# Altium PCB ROV_PCB.PcbDoc
Units mil, origin at the board's own origin, x right, y up, seen from the top; angles counter-clockwise.
Board outline 4330.7 x 3645.66 mil, 2 copper layers (Top Layer, Bottom Layer); 32 components, 35 nets, 120 pads, 0 vias.
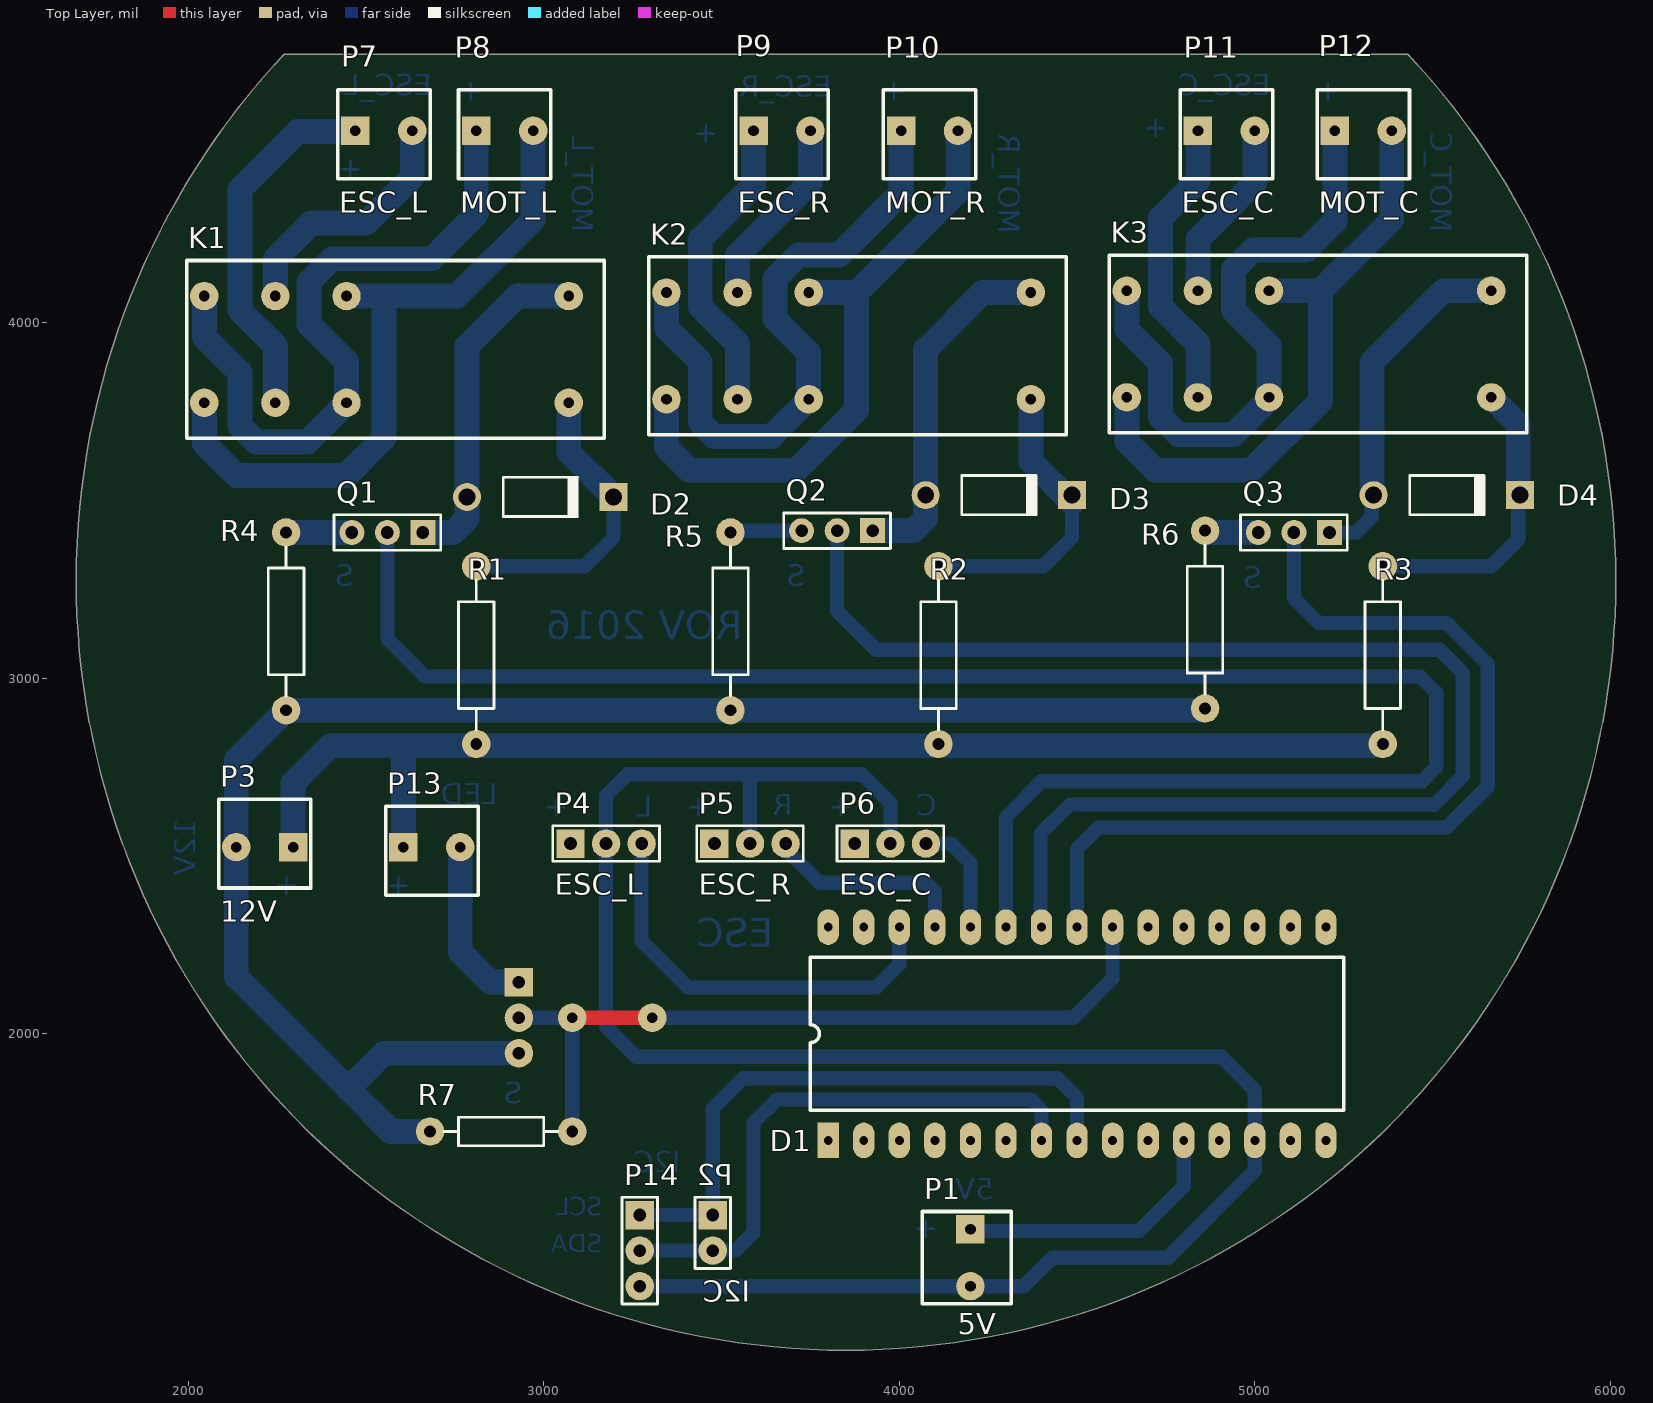
[diagram p0: Top Layer view]
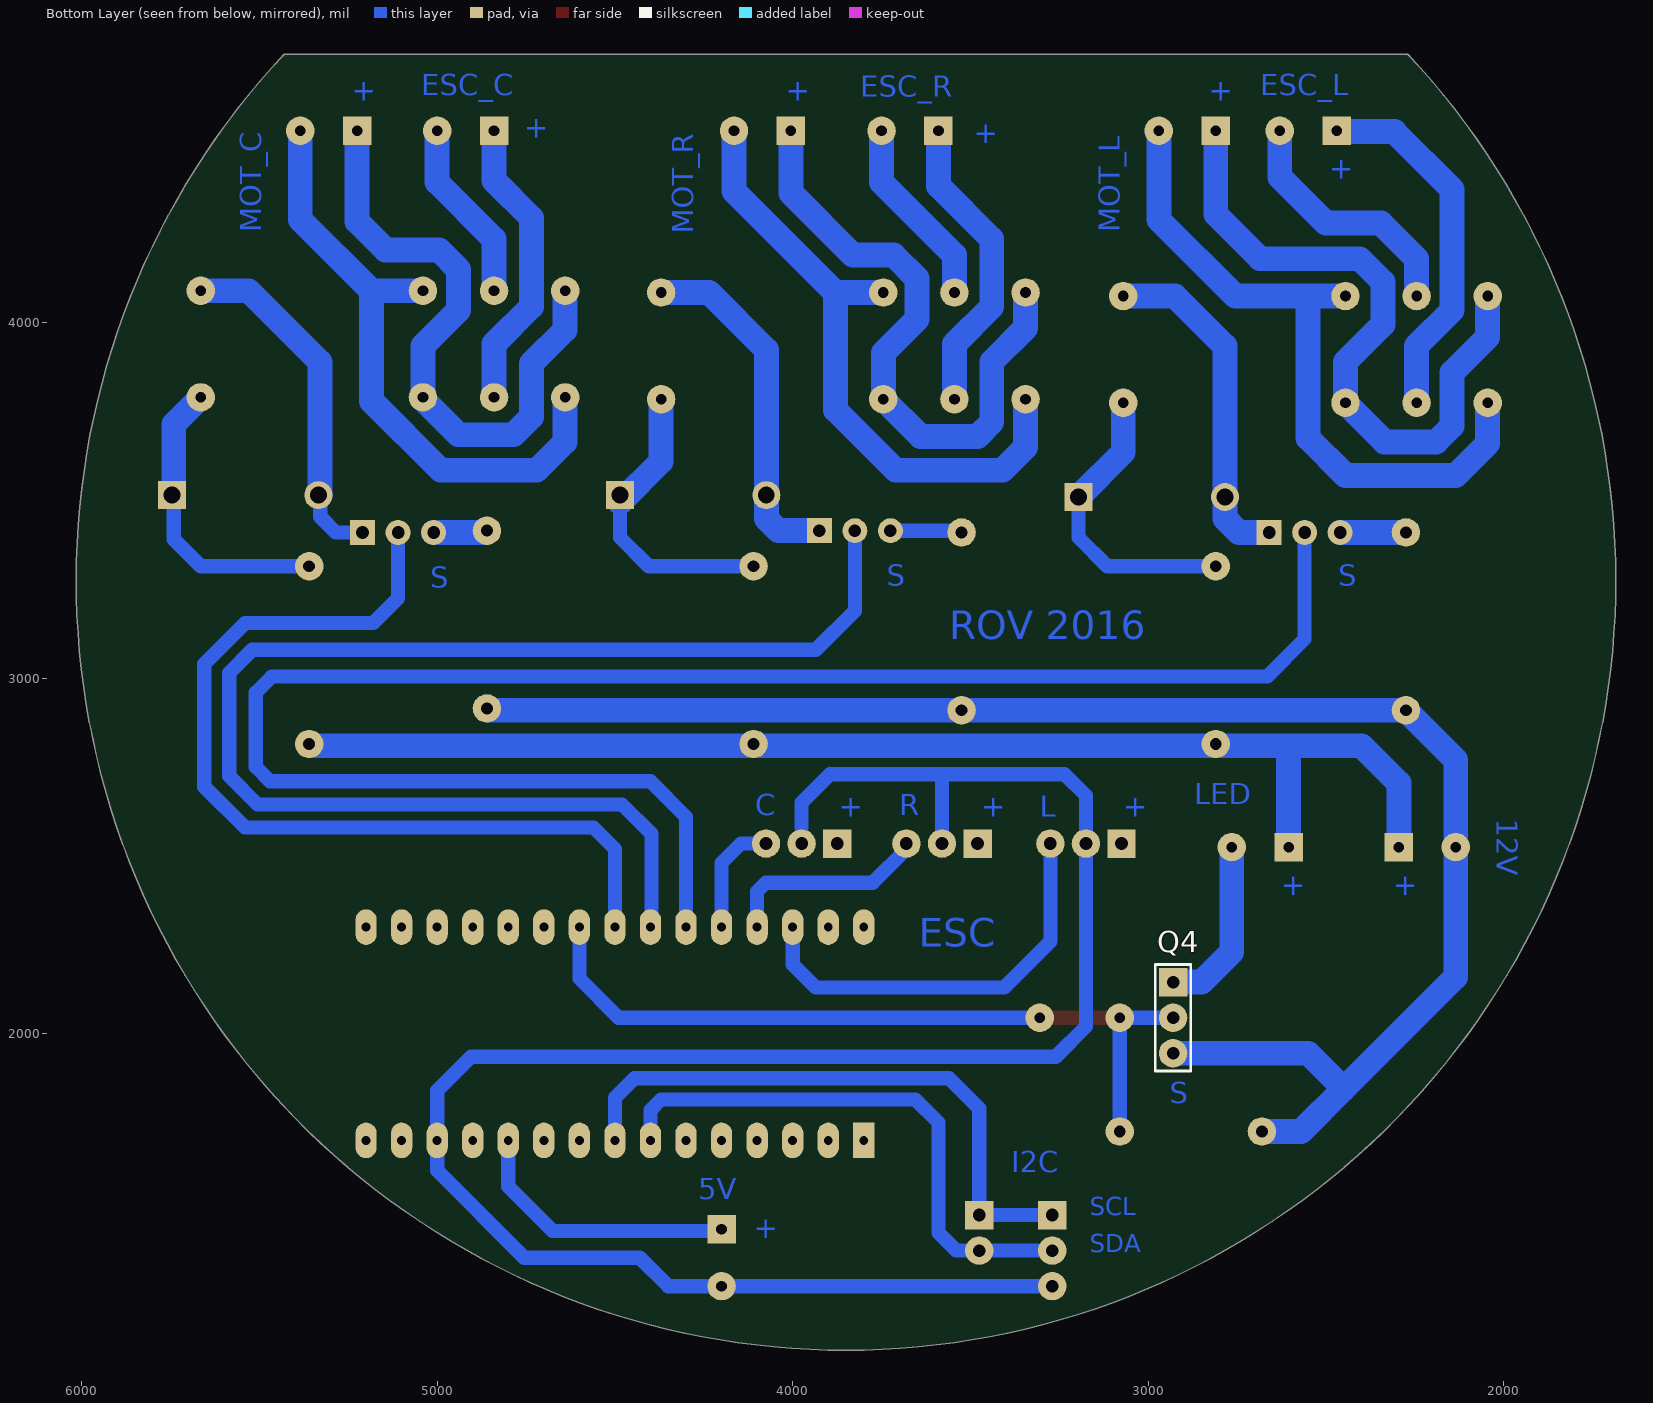
[diagram p1: Bottom Layer view, seen from below]

## Layer stack, top to bottom
Top Layer: signal copper 1.4
Dielectric: dielectric 12.6, FR-4, Dk 4.8
Bottom Layer: signal copper 1.4

## Board outline
2269.67,4755.31 ccw(c3850,3275) 5430.33,4755.31 5430.33,4755

## Design rules (kind name [scope] priority, off if disabled: settings)
Clearance [All] p1: gap=20
PolygonConnect [All] p1: connectstyle=Relief reliefconductorwidth=10 reliefentries=4 polygonreliefangle="90 Angle" airgapwidth=10
RoutingVias [All] p1: holewidth=28 width=80 viastyle="Through Hole" minholewidth=28 minwidth=70 maxholewidth=28 maxwidth=100
SolderMaskExpansion [All] p1: expansion=4
Width [All] p1: maxlimit=100 minlimit=40 preferedwidth=60
28 further rules are at their usual default settings.

## Components (designator, comment, footprint, x,y, rotation, side; value= is the part's Value field where it differs from the comment)
D1 "ARD_NANO" DIP30 3800,1700 r90 top
D2 "Diode 1N4001" DO-41 2990,3510 r0 top
D3 "Diode 1N4001" DO-41 4280,3515 r0 top
D4 "Diode 1N4001" DO-41 5540,3515 r0 top
K1 "Relay-DPDT" RELAY_CUSTOM 2045,3775 r90 top
K2 "Relay-DPDT" RELAY_CUSTOM 3345,3785 r90 top
K3 "Relay-DPDT" RELAY_CUSTOM 4640,3790 r90 top
P1 "5V" KLEMA 4200,1450 r270 top
P2 "I2C" HDR1X2 3475,1490 r270 top
P3 "12V" KLEMA 2295,2525 r180 top
P4 "ESC_L" HDR1X3#1 3075,2535 r0 top
P5 "ESC_R" HDR1X3#1 3480,2535 r0 top
P6 "ESC_C" HDR1X3#1 3875,2535 r0 top
P7 "ESC_L" KLEMA 2470,4540 r0 top
P8 "MOT_L" KLEMA 2810,4540 r0 top
P9 "ESC_R" KLEMA 3590,4540 r0 top
P10 "MOT_R" KLEMA 4005,4540 r0 top
P11 "ESC_C" KLEMA 4840,4540 r0 top
P12 "MOT_C" KLEMA 5225,4540 r0 top
P13 "LED" KLEMA 2605,2525 r0 top
P14 "I2C_SLAVE" HDR1X3#1 3270,1490 r270 top
Q1 "BS170" HDR1X3#2 2660,3410 r180 top
Q2 "BS170" HDR1X3#2 3925,3415 r180 top
Q3 "BS170" HDR1X3#2 5210,3410 r180 top
Q4 "IRF540N" HDR1X3#1 2930,2145 r270 bottom
R1 "100" AXIAL-0.5 2810,3065 r270 top
R2 "100" AXIAL-0.5 4110,3065 r270 top
R3 "100" AXIAL-0.5 5360,3065 r270 top
R4 "10" AXIAL-0.5 2275,3160 r90 top
R5 "10" AXIAL-0.5 3525,3160 r90 top
R6 "10" AXIAL-0.5 4860,3165 r90 top
R7 "10k" AXIAL-0.4 2880,1725 r180 top

## Footprints (in the part's own frame and the unit in brackets; to place one, negate y for a bottom-side part, rotate by r counter-clockwise, add the part's x,y. Pads: shape width x height; smd on the part's side, far side on the other; paste and mask are expansions set on the pad)
AXIAL-0.4 [mil] "Axial Device, Thru-Hole; 2 Leads; 0.4 in Pin Spacing"
  round 80 hole 33.46: 1(-200,0) 2(200,0)
  silkscreen extent -160,-40 160,40
AXIAL-0.5 [mil] "Axial Device, Thru-Hole; 2 Leads; 0.5 in Pin Spacing"
  round 80 hole 33.46: 1(-250,0) 2(250,0)
  silkscreen extent -210,-50 210,50
DIP30 [mil]
  rect 100x60 hole 25: 1(0,0)
  oval 100x60 hole 25: 2(0,-100) 3(0,-200) 4(0,-300) 5(0,-400) 6(0,-500) 7(0,-600) 8(0,-700) 9(0,-800) 10(0,-900) 11(0,-1000) 12(0,-1100) 13(0,-1200) 14(0,-1300) 15(0,-1400) 16(600,-1400) 17(600,-1300) 18(600,-1200) 19(600,-1100) 20(600,-1000) 21(600,-900) 22(600,-800) 23(600,-700) 24(600,-600) 25(600,-500) 26(600,-400) 27(600,-300) 28(600,-200) 29(600,-100) 30(600,0)
  silkscreen extent 85,-1450 515,50
DO-41 [mm] "Diode, Axial; Body 5.2 x 2.7 mm (LxDia. max), Lead Dia. 0.86 mm (max)"
  round 2 hole 1.2: 1(-5.23,0)
  rect 2x2 hole 1.2: 2(5.23,0)
  silkscreen extent -2.65,-1.4 2.75,1.4
HDR1X2 [mil] "Connector; Header; 2 Position"
  rect 80x80 hole 35.43: 1(0,0)
  round 80 hole 35.43: 2(100,0)
  silkscreen extent -50,-50 150,50
HDR1X3#1 [mil] "Connector; Header; 3 Position"
  rect 80x80 hole 35.43: 1(0,0)
  round 80 hole 35.43: 2(100,0) 3(200,0)
  silkscreen extent -50,-50 250,50
HDR1X3#2 [mil] "Connector; Header; 3 Position"
  rect 70x70 hole 35.43: 1(0,0)
  round 70 hole 35.43: 2(100,0) 3(200,0)
  silkscreen extent -50,-50 250,50
KLEMA [mil]
  rect 80x80 hole 30: 1(0,0)
  round 80 hole 30: 2(160,0)
  silkscreen extent -50,-135 210,115
RELAY_CUSTOM [mil]
  round 80 hole 30: 1(0,-200) 2(0,-400) 3(0,0) 4(300,-200) 5(300,-400) 6(300,0) 7(0,-1025) 8(300,-1025)
  silkscreen extent -100,-1125 400,50

## Part data
D2 D3 D4: "1 Amp General Purpose Rectifier"
K1 K2 K3: "Dual-Pole Dual-Throw Relay"
P1 P2 P3 P7 P8 P9 P10 P11 P12 P13: library part "Header 2", "Header, 2-Pin"
P4 P5 P6 P14: library part "Header 3", "Header, 3-Pin"
Q1 Q2 Q3 Q4: library part MOSFET-N, "N-Channel MOSFET"
R1 R2 R3 R4 R5 R6 R7: library part Res1, "Resistor"

## Free pads (board coordinates)
  round 80 hole 30: 0(3305,2045) ""(3080,2045)

## Nets (pads, with @x,y where several pads share a name; then routed paths per layer and width w, separated by ;. In a path a pad name is that pad's centre, name@x,y a point inside that pad or via, vN(x,y) a via of type N, cw(c..) or ccw(c..) an arc to the next point about the centre after c; other vN are vias at no path point)
5V: D1.11 P1.1 | length 790.1
  Bottom Layer w40: P1.1@4200,1465 4220,1445 4675,1445 4800,1570 D1.11
12V: P3.1 P13.1 R1.2 R2.2 R3.2 | length 3570.6
  Bottom Layer w70: P3.1 2295,2705 2400,2810 2600,2810 ; P13.1 2605,2805 2600,2810 ; R3.2@5355,2810 2600,2810
DGND: D1.13 P1.2 P4.2 P5.2 P6.2 P14.3 | length 5763.6
  Bottom Layer w40: P14.3 P1.2 ; P5.2 3580,2725 ; 3975,2580 3975,2650 3895,2730 3235,2730 3175,2670 P4.2 3175,2020 3260,1935 4905,1935 5000,1840 D1.13 5000,1615 4755,1370 4430,1370 4350,1290 4215.62,1290 P1.2@4200,1305.62
GND: P3.2 Q4.3 R4.1 R5.1 R6.1 R7.2 | length 4634.6
  Bottom Layer w70: R7.2 2570,1725 2450,1845 ; Q4.3 2550,1945 2450,1845 ; R6.1@4855,2910 R5.1 R4.1 2135,2770 P3.2 2135,2160 2450,1845
NetD1_7: D1.7 P2.2 P14.2 | length 1585.1
  Bottom Layer w40: P14.2 P2.2 3540,1390 3590,1440 3590,1750 3655,1815 4370,1815 4400,1785 D1.7
NetD1_8: D1.8 P2.1 P14.1 | length 1708
  Bottom Layer w40: P14.1 P2.1 3475,1790 3560,1875 4445,1875 4500,1820 D1.8
NetD1_22: D1.22 pad. pad.0 Q4.2 R7.1 | length 2180.6
  Top Layer w40: pad. pad.0
  Bottom Layer w40: Q4.2 pad. R7.1 ; pad.0 4490,2045 4600,2155 D1.22
NetD1_23: D1.23 Q3.2 | length 2599.1
  Bottom Layer w40: D1.23 4500,2520 4560,2580 5540,2580 5655,2695 5655,3040 5540,3155 5180,3155 5110,3225 Q3.2
NetD1_24: D1.24 Q2.2 | length 3862.3
  Bottom Layer w40: Q2.2 3825,3190 3935,3080 5520,3080 5585,3015 5585,2725 5505,2645 4480,2645 4397.5,2562.5 D1.24@4397.5,2302.5
NetD1_25: D1.25 Q1.2 | length 5100.1
  Bottom Layer w40: Q1.2 2560,3110 2665,3005 5465,3005 5510,2960 5510,2750 5470,2710 4400,2710 4300,2610 D1.25
NetD1_26: D1.26 P6.3 | length 327.8
  Bottom Layer w40: P6.3 4145,2535 4200,2480 D1.26
NetD1_27: D1.27 P5.3 | length 569.7
  Bottom Layer w40: P5.3@3680,2520 3775,2425 4075,2425 4100,2400 D1.27
NetD1_28: D1.28 P4.3 | length 1210.8
  Bottom Layer w40: P4.3@3275,2540 3275,2260 3405,2130 3935,2130 4000,2195 D1.28 D1.28@4000,2320
NetD2_1: D2.1 K1.8 Q1.1 | length 969.6
  Bottom Layer w70: Q1.1 2745,3410 2784.09,3449.09 D2.1 2784.09,3934.09 2925,4075 K1.8
NetD2_2: D2.2 K1.7 R1.1 | length 855.7
  Bottom Layer w40: R1.1@2805,3315 3115,3315 3195.91,3395.91 D2.2
  Bottom Layer w70: K1.7 3070,3635.91 D2.2
NetD3_1: D3.1 K2.8 Q2.1 | length 1000.8
  Bottom Layer w70: Q2.1 4040,3415 4074.09,3449.09 D3.1 4074.09,3924.09 4235,4085 K2.8
NetD3_2: D3.2 K2.7 R2.1 | length 867.4
  Bottom Layer w40: R2.1 4405,3315 4485.91,3395.91 D3.2
  Bottom Layer w70: K2.7 4370,3610 D3.2@4485.91,3494.09
NetD4_1: D4.1 K3.8 Q3.1 | length 991.5
  Bottom Layer w40: Q3.1 5285,3410 5329.09,3454.09 D4.1@5329.09,3515
  Bottom Layer w70: D4.1@5329.09,3515 5329.09,3889.09 5530,4090 K3.8
NetD4_2: D4.2 K3.7 R3.1 | length 842.9
  Bottom Layer w40: R3.1 5665,3315 5740.91,3390.91 D4.2@5740.91,3515
  Bottom Layer w70: K3.7 5740.91,3714.09 D4.2@5740.91,3515
NetK1_1: K1.1 P7.1 | length 1036.2
  Bottom Layer w70: K1.1 2245,3935 2145,4035 2145,4375 2307.5,4537.5 P7.1@2472.5,4537.5
NetK1_2: K1.2 K1.6 P8.1 | length 1937.8
  Bottom Layer w70: K1.6 2045,3960 2145,3860 2145,3710 2190,3665 2335,3665 K1.2 2445,3890 2340,3995 2340,4115 2405,4180 2685,4180 2810,4305 P8.1
NetK1_3: K1.3 K1.5 P8.2 | length 1964.8
  Bottom Layer w70: K1.3 2045,3660 2135,3570 2445,3570 2550,3675 2550,4075 ; K1.5 2550,4075 ; P8.2 2970,4290 2755,4075 2550,4075
NetK1_4: K1.4 P7.2 | length 715.3
  Bottom Layer w70: K1.4 2245,4180 2345,4280 2500,4280 2630,4410 P7.2
NetK2_1: K2.1 P9.1 | length 860.6
  Bottom Layer w70: K2.1 3545,3940 3440,4045 3440,4235 3590,4385 P9.1
NetK2_2: K2.2 K2.6 P10.1 | length 1752.8
  Bottom Layer w70: K2.6 3345,3985 3440,3890 3440,3720 3480,3680 3640,3680 K2.2 3745,3915 3650,4010 3650,4124.35 3715.65,4190 3830,4190 4005,4365 P10.1@4005,4515
NetK2_3: K2.3 K2.5 P10.2 | length 1780.4
  Bottom Layer w70: K2.3 3345,3650 3410,3585 3710,3585 3880,3755 3880,4085 ; K2.5 3880,4085 ; P10.2@4165,4515 4165,4370 3880,4085
NetK2_4: K2.4 P9.2 | length 539.9
  Bottom Layer w70: K2.4 3545,4190 3750,4395 P9.2
NetK3_1: K3.1 P11.1 | length 837
  Bottom Layer w70: K3.1 4840,3940 4735,4045 4735,4295 4840,4400 P11.1
NetK3_2: K3.2 K3.6 P12.1 | length 1743.8
  Bottom Layer w70: K3.6 4640,3980 4735,3885 4735,3735 4785,3685 4940,3685 5040,3785 K3.2 5040,3935 4940,4035 4940,4150 4995,4205 5145,4205 5225,4285 P12.1@5225,4520
NetK3_3: K3.3 K3.5 P12.2 | length 1751.8
  Bottom Layer w70: K3.3 4640,3665 4720,3585 4990,3585 5185,3780 5185,4090 ; K3.5 5185,4090 ; P12.2@5385,4520 5385,4290 5185,4090
NetK3_4: K3.4 P11.2 | length 516.3
  Bottom Layer w70: K3.4 4840,4235 5000,4395 P11.2
NetP13_2: P13.2 Q4.1 | length 495.2
  Bottom Layer w70: P13.2 2765,2230 2850,2145 Q4.1
NetQ1_3: Q1.3 R4.2 | length 185
  Bottom Layer w70: R4.2 Q1.3
NetQ2_3: Q2.3 R5.2 | length 202.1
  Bottom Layer w40: R5.2 3530,3415 Q2.3
NetQ3_3: Q3.3 R6.2 | length 152.1
  Bottom Layer w70: R6.2 4865,3410 Q3.3
pads on no net: D1.1 D1.2 D1.3 D1.4 D1.5 D1.6 D1.9 D1.10 D1.12 D1.14 D1.15 D1.16 D1.17 D1.18 D1.19 D1.20 D1.21 D1.29 D1.30 P4.1 P5.1 P6.1

## Other copper
Bottom Layer:
  text "ESC_L" at 2685,4640 h60
  text "ESC_C" at 5045,4640 h60
  text "ESC_R" at 3810,4635 h60
  text "+" at 2830,4625 h60
  text "+" at 4020,4625 h60
  text "+" at 5240,4625 h60
  text "+" at 4755,4520 h60
  text "+" at 3490,4505 h60
  text "+" at 2490,4405 h60
  text "MOT_L" at 3080,4255 h60 r270
  text "MOT_C" at 5495,4255 h60 r270
  text "MOT_R" at 4280,4250 h60 r270
  text "S" at 2465,3260 h60
  text "S" at 3735,3260 h60
  text "S" at 5020,3255 h60
  text "ROV 2016" at 3560,3110 h80
  text "LED" at 2870,2645 h60
  text "R" at 3700,2615 h60
  text "C" at 4105,2615 h60
  text "+" at 3070,2610 h60
  text "L" at 3305,2610 h60
  text "+" at 3470,2610 h60
  text "+" at 3870,2610 h60
  text "12V" at 2020,2605 h60 r90
  text "+" at 2310,2390 h60
  text "+" at 2625,2390 h60
  text "ESC" at 3645,2245 h80
  text "S" at 2940,1805 h60
  text "I2C" at 3385,1610 h60
  text "5V" at 4265,1535 h60
  text "SCL" at 3165,1490 h50
  text "+" at 4110,1425 h60
  text "SDA" at 3165,1385 h50

## Silkscreen, mask and mechanical layers (free items; w line width, h text height)
Mechanical 1:
  lines w10: 2269.67,4755 5430.33,4755 ; 2269.67,4755.31 ccw(c3850,3275) 5430.33,4755.31

## Dimensions
3850,3275 to 6440,4270 on Mechanical 2
5430.33,4755 to 3850,1109.65 on Mechanical 2